# EAGLE board V3_slice_noshift (EAGLE 5.11)
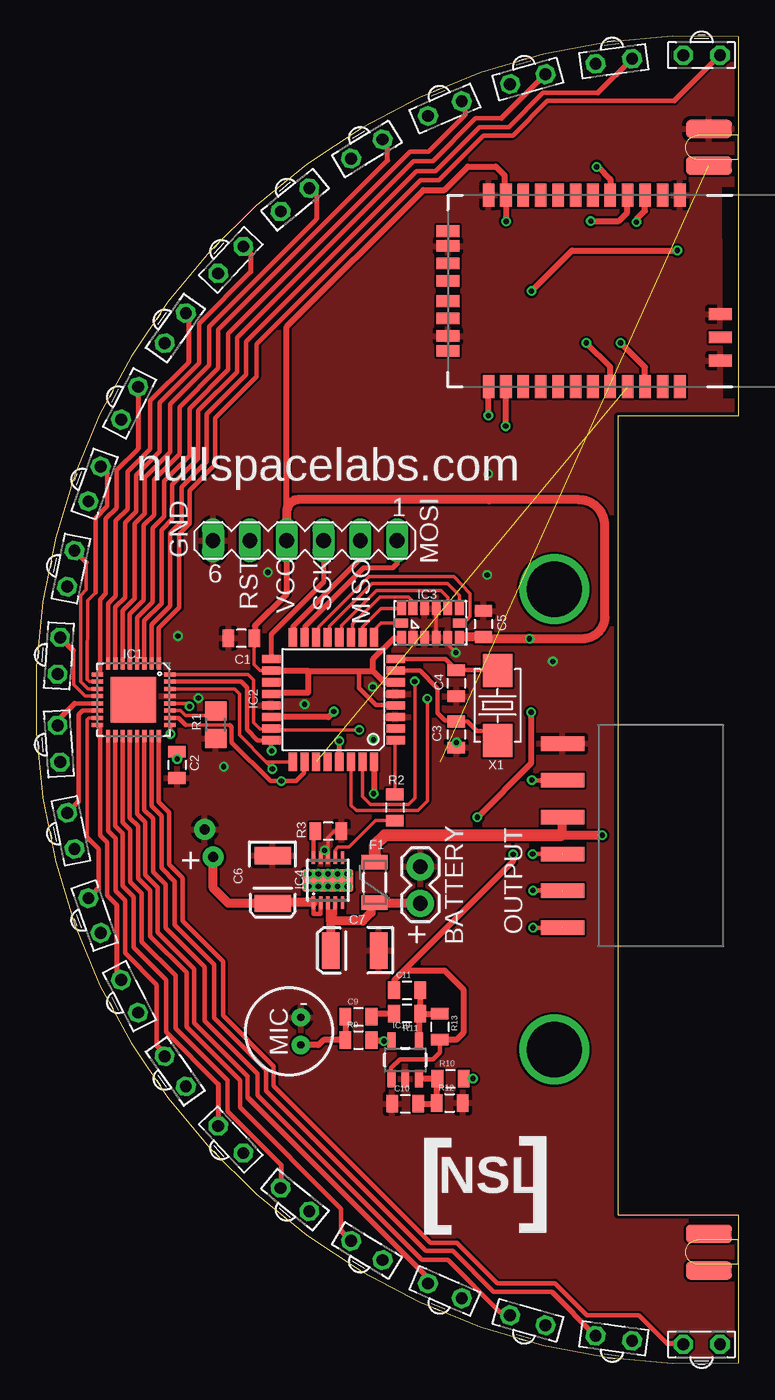
[diagram p0: board, top side]
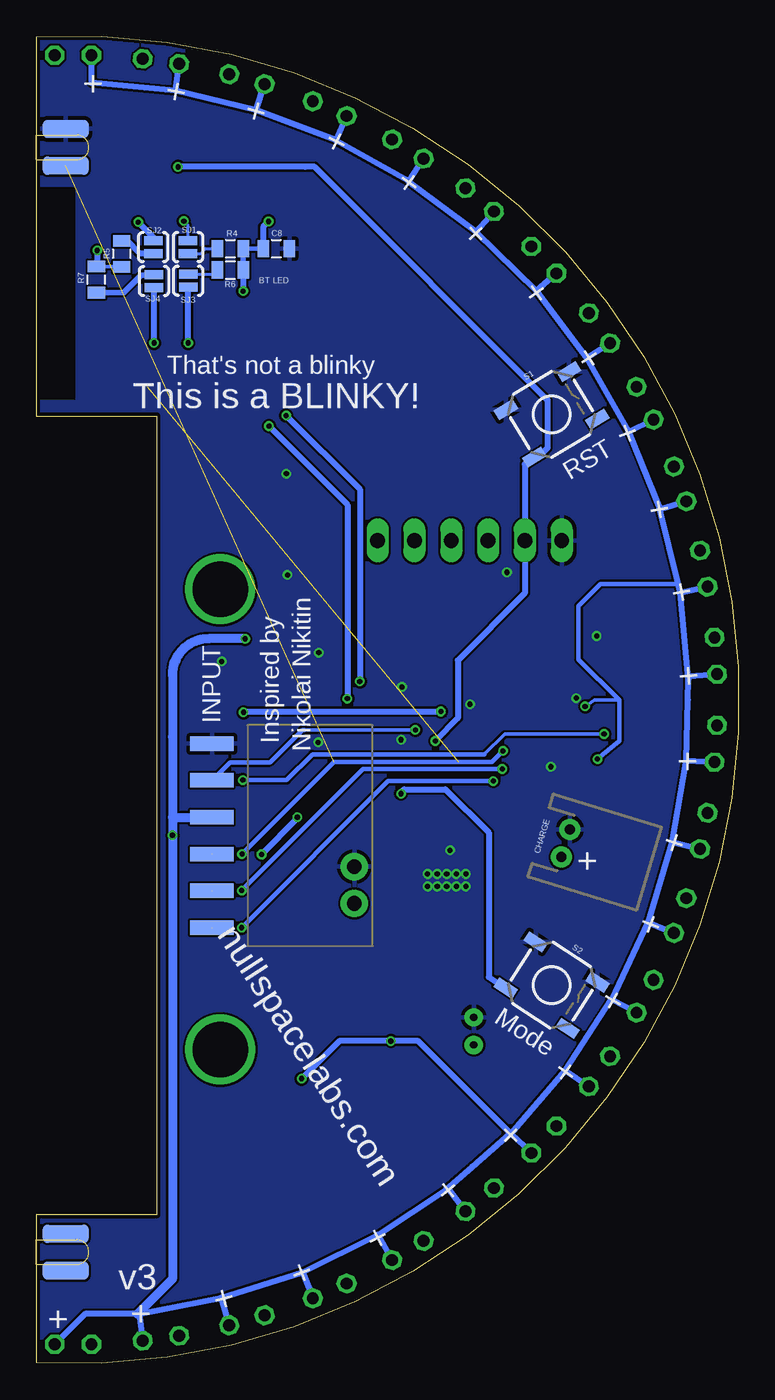
[diagram p1: board, bottom side, seen from below]

Size 48.44 x 91.53 mm. Coordinates in mm from the lower left corner, seen from the top.
Outline: 48.44,91.48 arc187 48.44,0.04 48.44,10.23 40.14,10.23 40.14,65.32 48.44,65.32 48.44,91.48
Copper layers (1*16): Top 0.035mm / dielectric 1.5mm / Bottom 0.035mm
Design rules "ITead_rule": minimum track width 6mil, minimum drill 12mil, track to track 6mil, track to pad 6mil, pad to pad 6mil, via to via 6mil, smd to smd 0mil, copper to edge 10mil, drill to drill 10mil, minimum pad ring 10mil, minimum via ring 6mil, stop-mask expansion 2mil, vias tented up to drill 100mil, thermal gap 10mil

## Footprints (pad centres in the part's own frame; a part is rotated, then mirrored left to right if it is on the bottom)
1X02 = drill 1.016 pad 1.88 round: 1 0,0; 2 2.54,0
0805 = smd 0.8 x 1.2: 1 -0.9,0; 2 0.9,0
EIA3528 = smd 1.2 x 2.5: A 1.65,0; C -1.65,0
JST-2-PTH-NS = drill 0.7 pad 1.448 round: 1 -1,0; 2 1,0
PTC-1206 = smd 1 x 1.8: 1 -1.4,0; 2 1.4,0
QFN32_XLP = smd 0.285 x 0.8: 1 -1.75,-2.5; 2 -1.25,-2.5; 3 -0.75,-2.5; 4 -0.25,-2.5; 5 0.25,-2.5; 6 0.75,-2.5; 7 1.25,-2.5; 8 1.75,-2.5; 17 1.75,2.5; 18 1.25,2.5; 19 0.75,2.5; 20 0.25,2.5; 21 -0.25,2.5; 22 -0.75,2.5; 23 -1.25,2.5; 24 -1.75,2.5 | smd 0.8 x 0.285: 9 2.5,-1.75; 10 2.5,-1.25; 11 2.5,-0.75; 12 2.5,-0.25; 13 2.5,0.25; 14 2.5,0.75; 15 2.5,1.25; 16 2.5,1.75; 25 -2.5,1.75; 26 -2.5,1.25; 27 -2.5,0.75; 28 -2.5,0.25; 29 -2.5,-0.25; 30 -2.5,-0.75; 31 -2.5,-1.25; 32 -2.5,-1.75 | smd 3.15 x 3.15: EP 0,0
TQFP32-08 = smd 1.27 x 0.559: 1 -4.293,2.8; 2 -4.293,2; 3 -4.293,1.2; 4 -4.293,0.4; 5 -4.293,-0.4; 6 -4.293,-1.2; 7 -4.293,-2; 8 -4.293,-2.8; 17 4.293,-2.8; 18 4.293,-2; 19 4.293,-1.2; 20 4.293,-0.4; 21 4.293,0.4; 22 4.293,1.2; 23 4.293,2; 24 4.293,2.8 | smd 0.559 x 1.27: 9 -2.8,-4.293; 10 -2,-4.293; 11 -1.2,-4.293; 12 -0.4,-4.293; 13 0.4,-4.293; 14 1.2,-4.293; 15 2,-4.293; 16 2.8,-4.293; 25 2.8,4.293; 26 2,4.293; 27 1.2,4.293; 28 0.4,4.293; 29 -0.4,4.293; 30 -1.2,4.293; 31 -2,4.293; 32 -2.8,4.293
LGA-14 = smd 0.6 x 0.9: 1 -2,-1; 2 -1.2,-1; 3 -0.4,-1; 4 0.4,-1; 5 1.2,-1; 6 2,-1; 8 2,1; 9 1.2,1; 10 0.4,1; 11 -0.4,1; 12 -1.2,1; 13 -2,1 | smd 0.9 x 0.6: 7 2,0; 14 -2,0
DFN10_3X3 = smd 0.3 x 0.85: 1 -1,-1.55; 2 -0.5,-1.55; 3 0,-1.55; 4 0.5,-1.55; 5 1,-1.55; 6 1,1.55; 7 0.5,1.55; 8 0,1.55; 9 -0.5,1.55; 10 -1,1.55 | smd 3.5 x 1.55: EXP 0,0
RN41 = smd 0.8 x 1.6: 1 -6.6,-6.6; 2 -5.4,-6.6; 3 -4.2,-6.6; 4 -3,-6.6; 5 -1.8,-6.6; 6 -0.6,-6.6; 7 0.6,-6.6; 8 1.8,-6.6; 9 3,-6.6; 10 4.2,-6.6; 11 5.4,-6.6; 12 6.6,-6.6; 13 6.6,6.6; 14 5.4,6.6; 15 4.2,6.6; 16 3,6.6; 17 1.8,6.6; 18 0.6,6.6; 19 -0.6,6.6; 20 -1.8,6.6; 21 -3,6.6; 22 -4.2,6.6; 23 -5.4,6.6; 24 -6.6,6.6 | smd 1.6 x 0.8: 25 -9.4,4.8; 26 -9.4,3.2; 27 -9.4,1.6; 28 9.4,3.1; 29 9.4,-3.1; 30 9.4,-4.122; 31 9.4,-1.9; 32 9.4,-0.7; 33 9.4,0.7; 34 9.4,1.9; 35 9.4,4.122
SOT23-5 = smd 0.55 x 1.2: 1 -0.95,-1.3; 2 0,-1.3; 3 0.95,-1.3; 4 0.95,1.3; 5 -0.95,1.3
1X06-SMD_EDGE = smd 1 x 3: 1 0,-0.08; 2 2.54,-0.08; 3 5.08,-0.08; 4 7.62,-0.08; 5 10.16,-0.08; 6 12.7,-0.08
IRL80A = drill 0.813 octagon: A 0,-1.27; K 0,1.27
MIC-6MM = drill 0.5 pad 1.27 round: 1 -0.8,0.95; 2 -0.8,-0.95
R0805 = smd 1.3 x 1.5: 1 -0.95,0; 2 0.95,0
TACTILE_SWITCH_SMD = smd 1.524 x 0.762: 1 -2.54,1.905; 2 2.54,1.905; 3 -2.54,-1.905; 4 2.54,-1.905
SJ_2S-NO = smd 0.635 x 1.27: 1 -0.45,0; 2 0.45,0
SLOT = smd 3.175 x 1.27: P$1 2.032,1.27; P$2 2.032,-1.27 | smd 3.175 x 1.27 bottom: P$3 2.032,1.27; P$4 2.032,-1.27
MA06-1 = drill 1.016 long: 1 -6.35,0; 2 -3.81,0; 3 -1.27,0; 4 1.27,0; 5 3.81,0; 6 6.35,0
5032 = smd 2.286 x 2.032: 1 -2.413,0; 2 2.413,0

## Placement (x,y rotation side)
BATTERY  [1X02]  26.5,34.26 270 top
C1  .1uF  [0805]  14.15,50.01 180 top
C2  .1uF  [0805]  9.71,41.27 270 top
C3  18pF  [0805]  28.98,43.36 270 top
C4  18pF  [0805]  28.99,46.9 270 top
C5  .01uF  [0805]  30.85,50.99 270 top
C6  4.7uF  [EIA3528]  16.31,33.37 270 top
C7  4.7uF  [EIA3528]  21.98,28.47 180 top
C8  .1uF  [0805]  31.88,76.88 0 bottom
C9  .1uF  [0805]  22.23,23.89 0 top
C10  1uF  [0805]  25.46,17.9 0 top
C11  100pF  [0805]  25.58,25.72 0 top
CHARGE  [JST-2-PTH-NS]  11.92,35.87 253 bottom
F1  PTCSMD  [PTC-1206]  23.35,33.17 90 top
IC1  TLC5947XLP  [QFN32_XLP]  6.71,45.76 180 top
IC2  MEGA8-AI  [TQFP32-08]  20.5,45.77 180 top
IC3  MMA7455L  [LGA-14]  27.19,51.06 0 top
IC4  MCP73123  [DFN10_3X3]  20.12,33.32 0 top
IC5  BLUETOOTH-RN41"  [RN41]  37.8,73.96 180 top
IC10  OPA344  [SOT23-5]  25.46,20.92 0 top
JP1  [1X06-SMD_EDGE]  36.23,30.04 90 top
JP2  [1X06-SMD_EDGE]  36.41,30.04 90 bottom
LED1  [IRL80A]  45.9,90.21 270 top
LED2  [IRL80A]  39.85,89.8 277.8 top
LED3  [IRL80A]  33.91,88.57 285.7 top
LED4  [IRL80A]  28.2,86.53 293.5 top
LED5  [IRL80A]  22.81,83.74 301.3 top
LED6  [IRL80A]  17.85,80.24 309.1 top
LED7  [IRL80A]  13.42,76.1 317 top
LED8  [IRL80A]  9.59,71.4 324.8 top
LED9  [IRL80A]  6.44,66.21 332.6 top
LED10  [IRL80A]  4.02,60.65 340.4 top
LED11  [IRL80A]  2.38,54.81 348.3 top
LED12  [IRL80A]  1.56,48.8 356.1 top
LED13  [IRL80A]  1.56,42.73 3.9 top
LED14  [IRL80A]  2.38,36.72 11.7 top
LED15  [IRL80A]  4.02,30.88 19.6 top
LED16  [IRL80A]  6.44,25.31 27.4 top
LED17  [IRL80A]  9.59,20.13 35.2 top
LED18  [IRL80A]  13.42,15.42 43 top
LED19  [IRL80A]  17.85,11.28 50.9 top
LED20  [IRL80A]  22.81,7.79 58.7 top
LED21  [IRL80A]  28.19,4.99 66.5 top
LED22  [IRL80A]  33.91,2.96 74.3 top
LED23  [IRL80A]  39.85,1.73 82.2 top
LED24  [IRL80A]  45.9,1.31 90 top
MIC1  MIC6MM  [MIC-6MM]  17.46,22.9 180 top
R1  20K  [R0805]  12.39,44.04 90 top
R2  1K  [0805]  24.75,38.33 270 top
R3  1.5K  [0805]  20.15,36.7 180 top
R4  1k  [0805]  35.06,76.88 0 bottom
R5  1k  [0805]  42.55,76.52 270 bottom
R6  1k  [0805]  35.06,75.41 0 bottom
R7  1k  [0805]  44.3,74.74 90 bottom
R9  2.2k  [0805]  22.23,22.29 0 top
R10  10k  [0805]  28.58,19.63 0 top
R11  1k  [0805]  25.58,24.12 180 top
R12  10k  [0805]  28.53,17.95 0 top
R13  100K  [0805]  27.85,23.21 270 top
S1  [TACTILE_SWITCH_SMD]  12.88,65.45 31 bottom
S2  [TACTILE_SWITCH_SMD]  12.88,26.08 327 bottom
SJ1  SOLDERJUMPERNO  [SJ_2S-NO]  37.98,76.98 270 bottom
SJ2  SOLDERJUMPERNO  [SJ_2S-NO]  40.37,76.98 270 bottom
SJ3  SOLDERJUMPERNO  [SJ_2S-NO]  37.95,74.67 90 bottom
SJ4  SOLDERJUMPERNO  [SJ_2S-NO]  40.32,74.64 90 bottom
SLOT1  SLOT  [SLOT]  48.44,83.86 180 top
SLOT2  SLOT  [SLOT]  48.44,7.66 180 top
SV1  [MA06-1]  18.54,56.75 180 top
X1  16Mhz  [5032]  31.82,45.37 270 top

## Library data of the parts
BATTERY C5 C8-C11 CHARGE F1 IC10 JP1 JP2 R4-R7 R9-R13 S1 S2 SJ1-SJ4 = SparkFun
C1-C4 C6 C7 IC1 MIC1 R2 R3 = slice_noshift
IC2 = atmel; MPN: ATMEGA8-16AU; OC_FARNELL: 9171371; OC_NEWARK: 73M8863
IC3 = MMA7455Lbreakoutboard-v1a
IC4 = V3_slice_noshift
IC5 = NSL_Mini_Quad
LED1-LED24 = led
R1 = rcl
SLOT1 SLOT2 = slice
SV1 = NSL
X1 = NSL_MiniQuad

## Nets
!CS: IC2.14 IC3.7
BLANK: IC1.30 IC2.25 JP1.2 JP2.2
BUTTON: IC2.32 S2.3
CHARGE: C6.A CHARGE.2 IC4.1 IC4.2
COL1: IC1.1 LED1.K
COL2: IC1.2 LED2.K
COL3: IC1.3 LED3.K
COL4: IC1.4 LED4.K
COL5: IC1.5 LED5.K
COL6: IC1.6 LED6.K
COL7: IC1.7 LED7.K
COL8: IC1.8 LED8.K
COL9: IC1.9 LED9.K
COL10: IC1.10 LED10.K
COL11: IC1.11 LED11.K
COL12: IC1.12 LED12.K
COL13: IC1.13 LED13.K
COL14: IC1.14 LED14.K
COL15: IC1.15 LED15.K
COL16: IC1.16 LED16.K
COL17: IC1.17 LED17.K
COL18: IC1.18 LED18.K
COL19: IC1.19 LED19.K
COL20: IC1.20 LED20.K
COL21: IC1.21 LED21.K
COL22: IC1.22 LED22.K
COL23: IC1.23 LED23.K
COL24: IC1.24 LED24.K
GND: BATTERY.1 C1.2 C2.2 C3.2 C4.2 C5.1 C6.C C7.C C8.2 C10.1 CHARGE.1 IC1.29 IC2.3 IC2.5 IC2.21 IC3.2 IC3.3 IC3.4 IC3.5 IC3.10 IC3.11 IC4.8 IC4.9 IC5.1 IC5.12 IC5.25 IC5.27 IC5.28 IC5.29 IC10.2 JP1.6 JP2.6 MIC1.2 R1.1 R3.1 R12.2 S1.1 S1.2 S2.1 S2.2 SLOT1.P$2 SLOT1.P$4 SV1.6
INT1/DRDY: IC2.13 IC3.8
INT2: IC2.12 IC3.9
MIC: C11.1 IC2.22 IC10.1 R13.2
MISO: IC2.16 SV1.2
MOSI: IC2.15 SV1.1
N$1: IC4.7 R2.2
N$3: C9.2 R11.2
N$5: R4.1 SJ1.2
N$6: IC4.10 R3.2
N$7: C3.1 IC2.7 X1.2
N$8: C4.1 IC2.8 X1.1
N$10: C11.2 IC10.4 R11.1 R13.1
N$11: C9.1 MIC1.1 R9.1
N$12: C10.2 IC10.3 R10.1 R12.1
N$13: IC1.27 R1.2
N$21: R6.1 SJ3.2
N$23: R5.1 SJ2.2
N$24: R7.1 SJ4.2
PIO3: IC5.20 SJ3.1
PIO4: IC5.22 SJ4.1
PIO5: IC2.27 IC5.21
PIO6: IC5.3 SJ2.1
PIO7: IC5.4 SJ1.1
RST: IC2.29 IC5.5 S1.3 SV1.5
RX: IC2.30 IC5.14
SCK: IC2.17 SV1.3
SCL/SPC: IC2.10 IC3.13
SCLK: IC1.31 IC2.24 JP1.3 JP2.3 SLOT1.P$1 SLOT1.P$3
SDA/SDI/SDO: IC2.11 IC3.12
SDO: IC2.9 IC3.14
SIN: IC1.32 IC2.23 JP2.5
SOUT: IC1.25 JP1.5
STAT: IC2.1 R2.1
TX: IC2.31 IC5.13
VBAT: BATTERY.2 C7.A F1.1 IC4.3 IC4.4
VCC: C1.1 C2.1 C5.2 C8.1 F1.2 IC1.28 IC2.4 IC2.6 IC2.18 IC2.20 IC3.1 IC3.6 IC5.11 IC10.5 JP1.4 JP2.4 LED1.A LED2.A LED3.A LED4.A LED5.A LED6.A LED7.A LED8.A LED9.A LED10.A LED11.A LED12.A LED13.A LED14.A LED15.A LED16.A LED17.A LED18.A LED19.A LED20.A LED21.A LED22.A LED23.A LED24.A R4.2 R5.2 R6.2 R7.2 R9.2 R10.2 SV1.4
XLAT: IC1.26 IC2.26 JP1.1 JP2.1

## Tracks (layer width: path | path; a pad name or v marks a point on that pad's centre or on a via)
!CS
  Top 0.203: IC2.14 19.27,50.1
  Top 0.254: IC2.14 19.46,50.22 19.46,50.77 22.94,54.25 28.81,54.25 29.93,53.08 29.93,51.5 29.54,51.06 IC3.7
BLANK  (via drill 0.36)  (1 unrouted)
  Top 0.203: IC1.30 9.02,46.53
  Top 0.254: IC1.30 9.23,46.5 13.7,46.5 14.03,46.17 14.03,43.33 15.87,41.48 | 15.87,41.48 IC2.25 | v16.29,40.99 16.34,41.01 15.87,41.48
  Top 0.305: 36.28,32.61 v34.27,32.61
  Top 0.406: JP1.2 36.28,32.61
  Bottom 0.305: v34.27,32.61 25.89,40.99 v16.29,40.99
BUTTON  (via drill 0.36)
  Top 0.406: v23.27,39.29 23.3,39.32 IC2.32
  Bottom 0.406: S2.3 17.22,26.64 17.22,36.59 20.21,39.59 23.07,39.59 23.27,39.39 v23.27,39.29
CHARGE
  Top 0.305: IC4.2 19.62,31.01 19.12,31.01 IC4.1 | 16.31,31.77 C6.A
  Top 0.61: IC4.1 16.31,31.77 | CHARGE.2 12.21,32.78 13.27,31.73 16.3,31.73 C6.A
COL1
  Top 0.305: IC1.1 8.46,50.71 9.86,52.11 9.86,57.19 10.57,57.9 10.57,60.19 12.35,61.97 12.35,65.19 15.2,68.04 15.2,70.3 26.5,81.6 27.77,81.6 30.84,84.68 32.87,84.68 35.26,87.06 44.02,87.06
  Top 0.356: 44.02,87.06 LED1.K
COL2
  Top 0.305: IC1.2 7.96,50.95 9.23,52.22 9.23,57.27 10.01,58.06 10.01,60.44 11.77,62.2 11.77,65.47 14.48,68.19 14.48,70.45 26.24,82.21 27.54,82.21 30.59,85.26 32.59,85.26 34.96,87.62 38.76,87.62
  Top 0.356: 38.76,87.62 LED2.K
COL3
  Top 0.305: IC1.3 7.46,51.21 8.64,52.39 8.64,57.47 9.38,58.21 9.38,60.6 11.18,62.4 11.18,65.7 13.85,68.37 13.85,70.73 26.04,82.92 27.36,82.92 30.31,85.87 32.1,85.87
  Top 0.356: 32.1,85.87 LED3.K
COL4
  Top 0.305: IC1.4 6.96,51.45 8.03,52.52 8.03,57.6 8.82,58.39 8.82,60.85 10.57,62.6 10.57,65.85 13.24,68.52 13.24,71.01 25.79,83.56 27.06,83.56 29.6,86.1
  Top 0.356: 29.6,86.1 29.6,86.8 LED4.K
COL5
  Top 0.305: IC1.5 6.46,51.69 7.42,52.65 7.42,57.8 8.13,58.51 8.13,60.95 9.89,62.71 9.89,65.96 12.55,68.62 12.55,71.29 24.24,82.97
  Top 0.356: 24.24,82.97 24.24,84.06 LED5.K
COL6
  Top 0.305: IC1.6 5.96,51.92 6.79,52.75 6.79,57.9 7.47,58.59 7.47,61.08 9.23,62.83 9.23,66.16 11.92,68.85 11.92,71.49 19.34,78.91
  Top 0.356: 19.34,78.91 19.34,80.55 LED6.K
COL7
  Top 0.305: IC1.7 5.46,52.16 6.13,52.82 6.13,57.98 6.89,58.74 6.89,61.26 8.52,62.88 8.52,66.26 11.23,68.98 11.23,71.72 14.79,75.28
  Top 0.356: 14.79,75.28 14.79,76.53 LED7.K
COL8
  Top 0.305: IC1.8 4.96,52.4 5.49,52.93 5.49,58.11 6.31,58.92 6.31,61.49 7.86,63.04 7.86,66.39 10.5,69.03
  Top 0.356: 10.5,69.03 10.5,72.26 LED8.K
COL9
  Top 0.305: 7.02,63.06 5.54,61.59 5.54,59 4.81,58.26 4.81,53.08 4.41,52.68 4.41,47.71 IC1.9 | LED9.K
  Top 0.356: LED9.K 7.02,63.06
COL10
  Top 0.254: IC1.10 3.72,47.01 3.69,47.01 3.51,47.16 3.54,52.6 4.1,53.15
  Top 0.305: 4.1,53.15 4.1,58.31 4.91,59.12 4.91,61.38
  Top 0.356: LED10.K 4.91,61.38
COL11
  Top 0.254: IC1.11 3.57,46.51 3.05,47.03 3.05,52.95 3.46,53.36 3.46,55.23
  Top 0.356: LED11.K 3.46,55.23
COL12
  Top 0.254: IC1.12 3.39,46.01 2.57,46.83 2.57,49.14
  Top 0.356: LED12.K 2.57,49.14
COL13
  Top 0.203: IC1.13 4.41,45.51
  Top 0.305: 4.41,45.51 2.64,45.51
  Top 0.356: 2.64,45.51 1.47,44.34 LED13.K
COL14
  Top 0.305: 2.93,38.77 2.93,44.75 3.19,45.01 IC1.14
  Top 0.356: 2.93,38.77 LED14.K
COL15
  Top 0.254: IC1.15 3.63,44.51 3.51,44.39 3.51,36.26
  Top 0.305: 3.51,36.26 4.3,35.48 4.3,32.78
  Top 0.356: 4.3,32.78 LED15.K
COL16
  Top 0.305: 5.54,31.62 4.91,32.25 4.91,35.91 4.41,36.41 4.41,43.81 IC1.16
  Top 0.356: 5.54,31.62 5.54,26.75 LED16.K
COL17
  Top 0.305: IC1.17 4.96,36.72 5.47,36.21 5.47,32.58 6.13,31.92 6.13,28.29 8.31,26.1 8.31,21.91
  Top 0.356: 8.31,21.91 8.86,21.37 LED17.K
COL18
  Top 0.305: IC1.18 5.46,37.06 5.98,36.54 5.98,32.91 6.71,32.17 6.71,28.67 8.95,26.43 8.95,22.85 12.55,19.25
  Top 0.356: 12.55,19.25 LED18.K
COL19
  Top 0.305: IC1.19 5.96,37.29 6.48,36.77 6.48,33.19 7.27,32.4 7.27,29.08 9.61,26.74 9.61,23.11 13.21,19.5 13.21,17.37 16.9,13.68 | 16.9,12.12 LED19.K
  Top 0.356: 16.9,13.68 16.9,12.12
COL20
  Top 0.305: IC1.20 6.46,37.61 7.02,37.05 7.02,33.44 7.86,32.61 7.86,29.46 10.37,26.94 10.37,23.21 14.05,19.53 14.05,17.65 21.04,10.66 21.04,9.13
  Top 0.356: 21.04,9.13 LED20.K
COL21
  Top 0.305: IC1.21 6.96,37.89 7.53,37.33 7.53,33.67 8.36,32.83 8.36,29.71 10.88,27.2 10.88,23.49 14.59,19.78 14.59,18.33
  Top 0.356: LED21.K 26.88,5.65 26.88,6.04 14.59,18.33
COL22
  Top 0.305: IC1.22 7.46,38.16 8.06,37.56 8.06,33.9 8.92,33.04 8.92,30.04 11.61,27.35 11.61,23.61 15.27,19.96 15.27,18.48 26.63,7.13 28.4,7.13 32.04,3.5
  Top 0.356: 32.04,3.5 32.5,3.5 LED22.K
COL23
  Top 0.305: IC1.23 7.96,38.44 8.64,37.76 8.64,34.16 9.56,33.24 9.56,30.24 12.27,27.53 12.27,23.82 15.86,20.24 15.86,18.79 26.91,7.74 28.73,7.74 31.55,4.92 35.57,4.92
  Top 0.356: 35.57,4.92 LED23.K
COL24
  Top 0.305: IC1.24 8.46,38.71 9.18,37.99 9.18,34.41 10.12,33.47 10.12,30.5 12.88,27.73 12.88,24 16.39,20.49 16.39,19.12 27.18,8.32 29.04,8.32 31.83,5.53 35.77,5.53 38.01,3.29 41.59,3.29 43.52,1.36
  Top 0.356: 43.52,1.36 44.58,1.36 LED24.K
GND  (via drill 0.36)
  Top 0.203: IC2.5 24.65,46.32
  Top 0.254: v28.95,49.01 28.39,49.57 IC3.5 | IC3.10 IC3.4 | IC1.29 | IC4.8 20.12,36.26 20.56,36.7 R3.1
  Top 0.305: IC2.3 24.83,44.54
  other vias: 23.27,43 18.51,45.46 23.21,46.65 31.11,54.37 29,42.82 9.78,50.16 19.46,33.75 20.12,33.75 20.78,33.75 20.78,32.89 20.12,32.89 19.46,32.89 12.94,41.14 11.19,45.88 35.65,48.4 15.97,54.55 19.9,35.37 31.19,61.36 21.44,33.75 21.44,32.89 18.8,33.75 18.8,32.89
  pour Top: 49.08,81.25 47.1,81.32 47.15,66.39 49.13,66.36 49.79,66.36 49.44,-1.63 -3.5,-1.63 -3.5,93.9 49.05,93.9
  pour Bottom: -4.41,95.34 49.97,95.34 50.22,81.3 45.57,81.3 45.57,66.29 51.11,66.29 50.68,-2.85 -4.41,-2.85
INT1/DRDY
  Top 0.203: 20.12,50.08 IC2.13
  Top 0.254: 20.12,50.08 20.25,50.21 20.25,50.84 23.17,53.76 28.38,53.76 29.19,52.95 IC3.8
INT2
  Top 0.203: IC2.12 20.88,50.09
  Top 0.254: IC2.12 21.06,50.22 21.06,50.87 23.48,53.28 27.92,53.28 28.39,52.81 IC3.9
MIC  (via drill 0.36)
  Top 0.305: IC10.1 24.49,19.64 24.49,20.36 25.1,20.97 27.39,20.97 27.85,21.43 R13.2
  Top 0.406: R13.2 27.86,22.32 28.99,22.32 29.47,22.8 29.47,25.8 28.18,27.09 25.38,27.09 | 25.38,27.09 24.68,26.4 C11.1 | 25.38,27.09 32.9,34.61 v32.9,35.1 | v30.44,37.66 34.14,41.37 v34.14,44.9 | v20.53,44.95 20.15,44.57 IC2.22
  Bottom 0.406: v32.9,35.1 30.44,37.56 v30.44,37.66 | v34.14,44.9 34.09,44.95 v20.53,44.95
MISO
  Top 0.203: 17.67,50.1 IC2.16
  Top 0.356: 17.67,50.1 17.69,50.11 17.69,50.79 22.35,55.46 SV1.2
MOSI
  Top 0.203: IC2.15
  Top 0.356: IC2.15 18.52,50.08 18.52,50.79 22.59,54.86 24.59,54.86 24.89,55.16 SV1.1
N$1
  Top 0.254: IC4.7 20.62,35.28 20.61,35.3 20.61,35.37 20.83,35.6 21.57,35.6 23.4,37.43 R2.2
N$2  (via drill 3.81)
  other vias: 35.74,21.63
N$3
  Top 0.406: C9.2 23.36,24.12 R11.2
N$5
  Bottom 0.203: SJ1.2 37.97,76.52 37.12,76.52 36.76,76.88 R4.1
N$6
  Top 0.305: IC4.10 arc90 19.13,34.88 19.13,36.58 R3.2
N$7
  Top 0.203: C3.1 28.95,44.34 | 31.81,43.86 31.81,43.6 31.81,42.97 X1.2
  Top 0.305: IC2.7 26.47,47.77 27.69,46.55 27.69,44.85 28.2,44.34 28.95,44.34 | C3.1 29.75,44.26 30.41,43.6 31.81,43.6
N$8
  Top 0.203: 24.81,48.58 IC2.8 | X1.1 31.76,47.85
  Top 0.305: 24.81,48.58 28.25,48.58 C4.1 31.81,47.8 X1.1
N$9  (via drill 3.81)
  other vias: 35.74,53.38
N$10
  Top 0.406: C11.2 R11.1 26.5,24.11 | 26.5,24.11 R13.1 | 26.5,24.11 26.41,24.02 IC10.4
N$11
  Top 0.406: MIC1.1 19.48,21.95 19.82,22.29 R9.1 C9.1
N$12
  Top 0.406: IC10.3 R10.1 27.63,19.58 R12.1 27.58,17.9 C10.2
N$13
  Top 0.203: IC1.27 9.02,45.01
  Top 0.254: IC1.27 9.22,45 9.25,45.03 9.96,45.03 10.32,44.67 11.77,44.67 12.04,44.95 R1.2
N$21
  Bottom 0.203: SJ3.2 36.25,75.12 arc-90 R6.1
N$23
  Bottom 0.203: SJ2.2 40.39,76.55 | 42.18,77.42 R5.1
  Bottom 0.406: 40.39,76.55 41.31,76.55 42.18,77.42
N$24
  Bottom 0.203: 44.29,73.86 R7.1
  Bottom 0.381: 44.29,73.86 42.4,73.86 41.21,75.05 40.36,75.05 SJ4.2
PIO3  (via drill 0.36)
  Top 0.406: IC5.20 39.6,68.73 v37.95,70.38
  Bottom 0.406: v37.95,70.38 SJ3.1
PIO4  (via drill 0.36)
  Top 0.406: IC5.22 42,68.69 v40.32,70.38
  Bottom 0.406: v40.32,70.38 SJ4.1
PIO5  (1 unrouted)
PIO6  (via drill 0.36)
  Top 0.203: 41.99,80.55 IC5.3 | v41.41,78.71 41.41,78.91
  Top 0.406: 41.99,80.55 41.99,79.49 41.41,78.91
  Bottom 0.203: SJ2.1 40.37,77.67
  Bottom 0.406: 40.37,77.67 v41.41,78.71
PIO7  (via drill 0.36)
  Top 0.203: 40.77,80.53 IC5.4
  Top 0.406: 40.77,80.53 40.77,79.37 40.19,78.78 v38.26,78.78
  Bottom 0.203: v38.26,78.78 37.98,78.5 SJ1.1
RST  (via drill 0.36)
  Top 0.356: IC2.29 20.9,42.95 v20.91,42.92
  Top 0.406: v38.67,82.52 38.77,82.52 39.61,81.68 IC5.5
  Bottom 0.406: v20.91,42.92 19.36,44.49 19.36,48.48 14.73,53.11 SV1.5 14.73,62.01 S1.3 13.79,62.51 13.16,63.14 13.16,66.44 29.24,82.52 29.88,82.52 v38.67,82.52
RX  (via drill 0.36)
  Top 0.203: IC5.14 32.44,67.32
  Top 0.254: IC2.30 21.72,41.46 21.72,38.47 22.1,38.12 26.32,38.12 26.98,38.78 v26.98,45.84
  Top 0.406: v32.39,64.64 32.39,67.35 IC5.14
  Bottom 0.406: v26.98,45.84 26.98,59.23 v32.39,64.64
SCK
  Top 0.203: IC2.17
  Top 0.356: SV1.3 19.81,53.87 16.21,50.27 IC2.17
SCL/SPC
  Top 0.203: IC2.10
  Top 0.254: IC2.10 22.51,50.08 22.51,50.79 23.78,52.06 IC3.13
SCLK  (via drill 0.36)  (3 unrouted)
  Top 0.203: IC1.31 9.02,47.01
  Top 0.305: IC1.31 14.12,47.01 14.54,46.6 14.54,43.71 15.27,42.97 IC2.24 | IC2.24 | IC2.24 16.21,42.26 v16.24,42.23 | JP1.3 v34.25,35.12
  Bottom 0.305: v16.24,42.23 17,41.47 27.9,41.47 v34.25,35.12
  Bottom 0.406: JP2.3 36.3,35.1
SDA/SDI/SDO
  Top 0.203: IC2.11
  Top 0.254: IC2.11 21.83,50.19 21.83,50.97 23.7,52.85 25.69,52.85 25.99,52.54 IC3.12
SDO
  Top 0.254: IC2.9 23.3,50.59 23.77,51.06 IC3.14
SIN  (via drill 0.36)
  Top 0.203: IC1.32 9.02,47.52 | 16.24,43.75 IC2.23
  Top 0.254: IC1.32 14.61,47.51 14.99,47.14 14.99,44.19 15.45,43.73 15.47,43.75 16.24,43.75 16.3,43.68 v22.28,43.68
  Bottom 0.254: 29.93,43.68 v22.28,43.68
  Bottom 0.305: JP2.5 35.08,41.45 32.32,41.45 30.08,43.68 29.93,43.68
SOUT  (via drill 0.36)
  Top 0.203: IC1.25 9.01,44.01
  Top 0.254: IC1.25 9.27,44.01 v9.27,43.4
  Top 0.305: v34.2,40.23 34.22,40.2 JP1.5
  Bottom 0.254: v9.27,43.4 16.12,43.4 17.51,42.02
  Bottom 0.305: 17.51,42.02 17.52,42 29.39,42 31.17,40.23 v34.2,40.23
STAT
  Top 0.254: IC2.1 24.75,42.92 R2.1
TX  (via drill 0.36)
  Top 0.203: IC2.31 22.49,41.48 | v26.12,47.03 26.07,46.98
  Top 0.254: 26.14,47.01 v26.12,47.03 26.12,38.98 25.69,38.55 23.07,38.55 22.51,39.11 IC2.31
  Top 0.305: v26.12,47.03 26.09,47.01
  Top 0.406: v31.2,65.37 IC5.13
  Bottom 0.406: v26.12,47.03 26.12,60.29 v31.2,65.37
VBAT
  Top 0.305: IC4.3 20.12,31.01 20.45,31.01 20.63,31.01 IC4.4
  Top 0.61: 20.3,30.52 20.3,31.01 20.45,31.01 | 20.3,30.52 C7.A | 20.3,30.52 20.33,30.5 22.51,30.5 23.1,31.09 23.1,31.77 F1.1 23.35,31.72 BATTERY.2
VCC  (via drill 0.36)
  Top 0.203: IC2.20 16.25,46.22 16.26,46.22 | IC2.18 16.24,47.74 | IC2.6 24.78,46.96 24.04,46.96 | IC5.11 32.52,80.67
  Top 0.254: 29.22,50.09 IC3.6 | IC2.18 15.45,47.77 15.02,48.2 15.02,49.92 C1.1 | IC1.28 10.57,45.51 v10.57,45.31 | C2.1 9.72,42.21 v9.72,41.67
  Top 0.305: IC2.4 24.76,45.41 23.43,45.41 22.26,46.58 22.26,47.69 22.31,47.74 | 36.18,36.42 36.31,36.42
  Top 0.406: 23.25,47.74 24.04,46.96 | 23.25,47.74 22.31,47.74 18.75,47.74 | 15.09,50.08 14.97,50.08 | 15.09,50.08 15.09,50.87 17.25,53.03 17.25,56.73 SV1.4 17.27,71.49 26.7,80.92 28.15,80.92 29.78,82.54 31.71,82.54 32.32,81.93 32.32,80.64 IC5.11 32.4,78.77 v32.42,78.76 | 15.09,50.08 15.1,50.07 C1.1 | 16.24,47.74 16.27,47.77 | 23.25,47.74 23.25,48.56 24.67,49.98 25.11,49.98 IC3.1 | 18.75,47.74 18.75,46.25 16.29,46.25 16.25,46.22 | v44.23,76.75 36.96,76.75 v34.17,73.96 | R9.2 23.2,22.22 v23.98,22.22 IC10.5 | v30.13,19.63 R10.2 | 18.75,47.74 18.72,47.77 IC2.18
  Top 0.61: SV1.4 17.27,58.69 arc-90 18.17,59.58 31.25,59.56 37.45,59.56 arc-90 39.22,57.78 39.22,51.5 arc-90 37.69,49.97 v34.03,49.97 | 29.22,50.09 C5.2 30.97,49.97 v34.03,49.97 | v34.03,49.97 33.99,50.01 | v39.05,36.42 36.18,36.42 | 36.31,36.42 JP1.4 | F1.2 23.21,34.57
  Top 0.813: 36.18,36.42 24.06,36.42 23.35,35.71 F1.2
  Bottom 0.203: 15.73,15.84 15.7,15.82 | 8.76,25.1 8.72,25.09 | 6.26,30.41 6.23,30.4 | 5.42,58.9 5.37,58.92 | 22.75,81.49 22.73,81.53 | 27.79,84.34 27.78,84.37 | 20.18,11.97 20.05,12.06 | 3.44,47.17 3.44,47.41 | 10.45,69.33 10.47,69.36 | 41.32,3.4 41.33,3.42 | 47.2,1.28 47.17,1.3 LED24.A | R7.2 44.28,75.62 R5.2 44.22,75.62 44.23,75.63 | R6.2 34.17,75.39
  Bottom 0.254: v10.57,45.31 9.95,45.75 8.22,45.75
  Bottom 0.305: v9.72,41.67 8.22,42.92 8.22,45.75 11.03,48.56 11.03,52.23 9.52,53.74 4.15,53.74 | v39.05,36.42 39.05,37.66 | C8.1 R4.2
  Bottom 0.381: R4.2 R6.2
  Bottom 0.406: v32.42,78.76 32.78,78.39 C8.1 | LED23.A 41.33,3.42 35.68,4.52 | 30.07,6.29 LED21.A | 24.87,8.86 LED20.A | 20.05,12.06 LED19.A | LED18.A 15.7,15.82 11.94,20.21 | 11.94,20.21 LED17.A | LED16.A 8.72,25.09 6.26,30.41 | LED15.A 6.23,30.4 4.56,35.94 | 4.56,35.94 LED14.A | 3.6,41.59 LED13.A | 3.44,47.41 LED12.A | 4,53.15 LED11.A | LED10.A 5.37,58.92 7.56,64.25 | 7.56,64.25 LED9.A | 10.47,69.36 LED8.A | 18.12,78.06 LED6.A | LED5.A 22.73,81.53 27.79,84.34 | LED4.A 27.78,84.37 33.29,86.42 | 33.29,86.42 LED3.A | 38.84,87.78 LED2.A | LED1.A 44.62,88.31 38.84,87.78 | 13.95,73.96 LED7.A | 35.68,4.52 30.07,6.29 | 30.07,6.29 24.87,8.86 | 24.87,8.86 20.18,11.97 18.36,13.55 15.73,15.84 22.11,22.22 v23.98,22.22 27.54,22.22 v30.13,19.63 | 11.94,20.21 8.76,25.1 | 4.56,35.94 3.6,41.59 | 3.6,41.59 3.48,45.75 3.44,47.17 4,53.15 | 4,53.15 4.15,53.74 5.42,58.9 | 7.56,64.25 10.45,69.33 13.95,73.96 | 13.95,73.96 18.12,78.06 | 18.12,78.06 22.75,81.49 | 33.29,86.42 38.84,87.78 | 35.68,4.52 LED22.A | 47.17,1.3 45.07,3.4 41.46,3.4 41.32,3.4 | v44.23,76.75 44.23,75.63 | 34.17,75.39 v34.17,73.96
  Bottom 0.61: 39.05,47.47 arc90 36.53,49.98 34.04,49.98 v34.03,49.97 | 39.05,47.47 39.05,43.2 | 39.05,47.47 39.05,47.52 arc90 36.58,49.98 | 39.05,43.2 arc90 39.02,43.22 | 39.05,43.2 v39.05,36.42 39.05,5.82 41.46,3.4 | 39.05,37.66 JP2.4
XLAT  (via drill 0.36)  (1 unrouted)
  Top 0.254: 9.73,44.51 9.73,44.52 9.84,44.52 | 13.34,44.04 10.32,44.04 | 18.47,41.45 IC2.26
  Top 0.305: 9.73,44.51 IC1.26 | 10.32,44.04 9.84,44.52 | 13.34,44.04 13.49,43.88 13.49,42.82 16.16,40.15 v16.91,40.15 17.91,40.15 18.47,40.71 18.47,41.45 | JP1.1 v34.27,30.04
  Bottom 0.305: v34.27,30.04 24.16,40.15 v16.91,40.15

## Text on the board
tPlace: nullspacelabs.com | GND | MOSI | RST | VCC | SCK | MISO | OUTPUT | + | + | MIC | NSL | [ | ]
bPlace: + | + | + | + | + | + | BT LED | + | + | That's not a blinky | This is a BLINKY! | + | RST | + | Nikolai Nikitin | + | Inspired by | + | INPUT | + | + | + | + | + | Mode | + | + | nullspacelabs.com | + | + | + | v3 | + | + | +